# Altium PCB ADCAN.PcbDoc
Units mm, origin at the board's own origin, x right, y up, seen from the top; angles counter-clockwise.
Board outline 44 x 44 mm, 2 copper layers (Top Layer, Bottom Layer); 47 components, 39 nets, 161 pads, 52 vias.
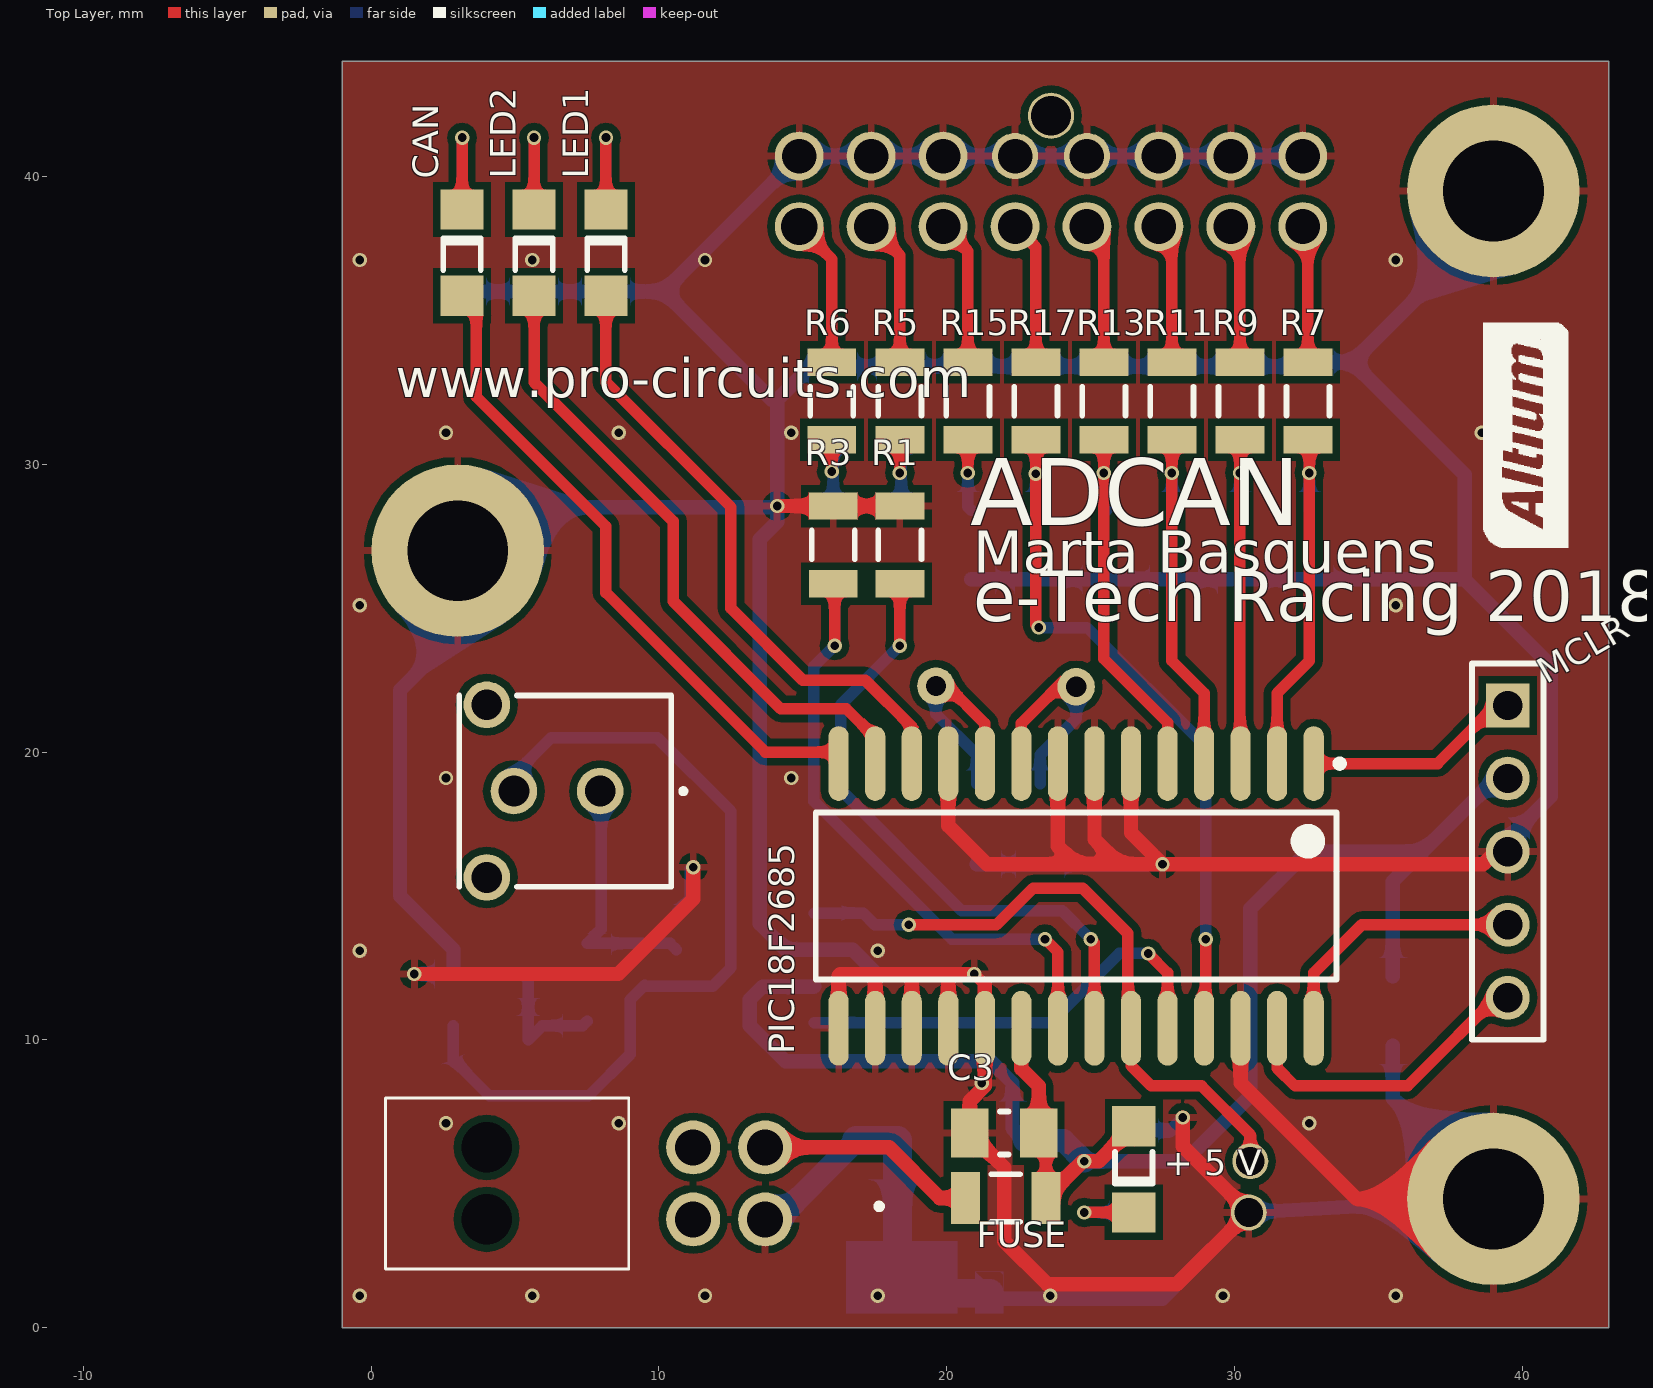
[diagram p0: Top Layer view]
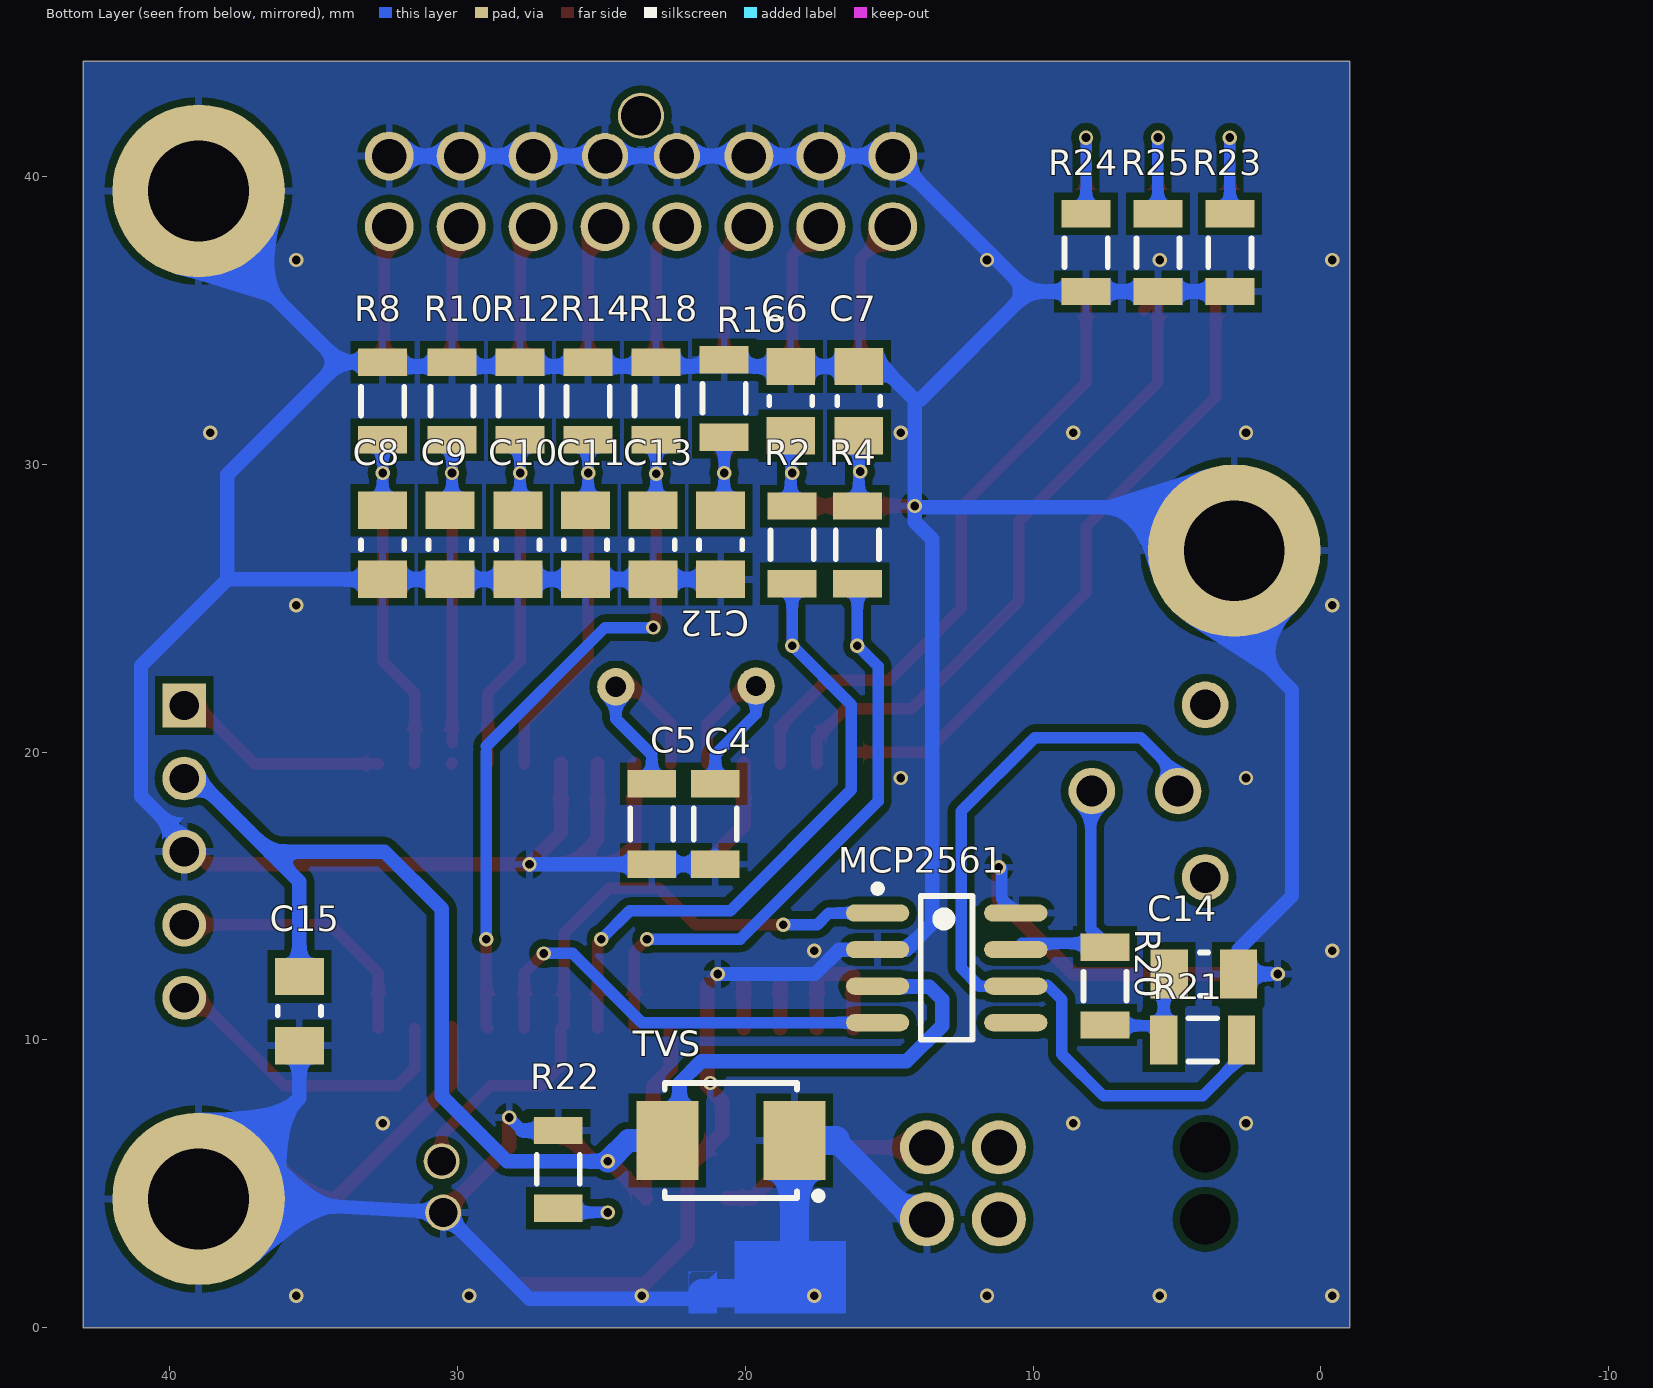
[diagram p1: Bottom Layer view, seen from below]

## Layer stack, top to bottom
Top Solder: solder mask 0.0102, Solder Resist, Dk 3.5
Top Layer: signal copper 0.0356
Dielectric 1: dielectric 0.32, FR-4, Dk 4.8
Bottom Layer: signal copper 0.0356
Bottom Solder: solder mask 0.0102, Solder Resist, Dk 3.5

## Board outline
-1,0 43,0 43,44 -1,44

## Design rules (kind name [scope] priority, off if disabled: settings)
Clearance [All] p1: gap=0.254 ignorepadtopadclearanceinfootprint=FALSE except(0: Arc-Hole Track-Hole SMDPad-Hole THPad-Hole Via-Hole Fill-Hole Poly-Hole Region-Hole Text-Hole)
PolygonConnect [All] p1: connectstyle=Relief reliefconductorwidth=0.254 reliefentries=4 polygonreliefangle="90 Angle" airgapwidth=0.254
RoutingVias [All] p1: holewidth=0.3 width=0.5 viastyle="Through Hole" minholewidth=0.3 minwidth=0.5 maxholewidth=0.3 maxwidth=0.5
SolderMaskExpansion [All] p1: expansion=0.102
Width [All] p1: maxlimit=1 minlimit=0.4 preferedwidth=0.4
30 further rules are at their usual default settings.

## Classes and differential pairs
component class ADCAN_v1: "+ 5 V" C3 C4 C5 C14 C15 CAN LED1 LED2 LEDalim LEDenviarCAN MCP2561 PIC18F2685 "Pin Header Programació" R20 R21 R22 R23 R24 R25
component class ADCAN1_v1: Alimentació C6 C7 C8 C9 C10 C11 C12 C13 FUSE "Molex Sensors" R1 R2 R3 R4 R5 R6 R7 R8 R9 R10 R11 R12 R13 R14 R15 R16 R17 R18 TVS

## Components (designator, comment, footprint, x,y, rotation, side; value= is the part's Value field where it differs from the comment)
"+ 5 V" "150120GS75000" 1206_A 26.5,5.5 r90 top
C3 "100nF" CAPC3216X102X94LL20 22,6.761 r0 top
C4 "15pF" CAPC1206(3216)100_L 21.043,17.5 r270 bottom
C5 "15pF" CAPC1206(3216)100_L 23.25,17.5 r270 bottom
C6 "100nF" CAPC3216X102X94LL20 18.42,32.2 r270 bottom
C7 "100nF" CAPC3216X102X94LL20 16.056,32.2 r270 bottom
C8 "100nF" CAPC3216X102X94LL20 32.606,27.2 r90 bottom
C9 "100nF" CAPC3216X102X94LL20 30.256,27.2 r90 bottom
C10 "100nF" CAPC3216X102X94LL20 27.906,27.2 r90 bottom
C11 "100nF" CAPC3216X102X94LL20 25.556,27.2 r90 bottom
C12 "100nF" CAPC3216X102X94LL20 20.856,27.2 r90 bottom
C13 "100nF" CAPC3216X102X94LL20 23.206,27.2 r90 bottom
C14 "100nF" CAPC3216X102X94LL20 4.06,12.285 r180 bottom
C15 "0.1uF" CAPC3216X102X94LL20 35.5,11 r90 bottom
CAN "150120BS75000" 1206_A 3.157,37.356 r270 top
FUSE "1206L016WR" LFUS-1206L016WR_V 22.05,4.5 r180 top
LED1 "150120BS75000" 1206_A 8.157,37.356 r270 top
LED2 "150120BS75000" 1206_A 5.657,37.356 r270 top
MCP2561 "" SOIC-SN8_N 13,12.5 r180 bottom
P? "MTLW-105-05-G-S-190" SMTC-MTLW-105-05-X-S-190 39.5,21.62 r270 top
PIC18F2685 "" SOIC-SO28_M 24.5,15 r270 top
R1 "4,29K" RESC1206(3216)_L 18.37,27.2 r270 top value="22000.00 Ohm"
R2 "4,29K" RESC1206(3216)_L 18.37,27.2 r90 bottom value="22000.00 Ohm"
R3 "4,29K" RESC1206(3216)_L 16.056,27.2 r270 top value="22000.00 Ohm"
R4 "4,29K" RESC1206(3216)_L 16.106,27.2 r90 bottom value="22000.00 Ohm"
R5 "1,6K" RESC1206(3216)_L 18.37,32.2 r270 top value="22000.00 Ohm"
R6 "1,6K" RESC1206(3216)_L 16.006,32.2 r270 top value="22000.00 Ohm"
R7 "1,6K" RESC1206(3216)_L 32.556,32.2 r270 top value="22000.00 Ohm"
R8 "1,6K" RESC1206(3216)_L 32.606,32.2 r90 bottom value="22000.00 Ohm"
R9 "1,6K" RESC1206(3216)_L 30.191,32.2 r270 top value="22000.00 Ohm"
R10 "1,6K" RESC1206(3216)_L 30.191,32.2 r90 bottom value="22000.00 Ohm"
R11 "1,6K" RESC1206(3216)_L 27.827,32.2 r270 top value="22000.00 Ohm"
R12 "1,6K" RESC1206(3216)_L 27.827,32.2 r90 bottom value="22000.00 Ohm"
R13 "1,6K" RESC1206(3216)_L 25.463,32.2 r270 top value="22000.00 Ohm"
R14 "1,6K" RESC1206(3216)_L 25.463,32.2 r90 bottom value="22000.00 Ohm"
R15 "1,6K" RESC1206(3216)_L 20.734,32.2 r270 top value="22000.00 Ohm"
R16 "1,6K" RESC1206(3216)_L 20.734,32.29 r90 bottom value="22000.00 Ohm"
R17 "1,6K" RESC1206(3216)_L 23.099,32.2 r270 top value="22000.00 Ohm"
R18 "1,6K" RESC1206(3216)_L 23.099,32.2 r90 bottom value="22000.00 Ohm"
R20 "60" RESC1206(3216)_L 7.5,11.865 r90 bottom value="1620.00 Ohm"
R21 "60" RESC1206(3216)_L 4.107,10 r0 bottom value="1620.00 Ohm"
R22 "1K 1% 1206(3216)" RESC1206(3216)_L 26.5,5.5 r270 bottom value="22000.00 Ohm"
R23 "1K 1% 1206(3216)" RESC1206(3216)_L 3.157,37.356 r90 bottom value="22000.00 Ohm"
R24 "1K 1% 1206(3216)" RESC1206(3216)_L 8.157,37.356 r90 bottom value="22000.00 Ohm"
R25 "1K 1% 1206(3216)" RESC1206(3216)_L 5.657,37.356 r90 bottom value="22000.00 Ohm"
TVS "" ONSC-SMB-2-403A-03_J_V 20.5,6.5 r0 bottom
? "Comment" 0430450212 10.427,18.644 r90 top

## Footprints (in the part's own frame and the unit in brackets; to place one, negate y for a bottom-side part, rotate by r counter-clockwise, add the part's x,y. Pads: shape width x height; smd on the part's side, far side on the other; paste and mask are expansions set on the pad)
1206_A [mm] "Chip LED, 2-Leads, Body 3.2x1.6mm, IPC Medium Density"
  rect 1.4x1.5 smd: 1(-1.5,0) 2(1.5,0)
  silkscreen extent -0.5,-0.67 0.6,0.65, body extent -1.6,-0.8 1.6,0.8, height 0.68
0430450212 [mm]
  round 1.62 hole 1.07: 1(0,2.47) 2(0,5.47) 3(-3,6.41) 4(3,6.41)
  silkscreen extent -3.32,-0.49 3.32,7.37
CAPC1206(3216)100_L [mm] "Chip Capacitor, Body 3.2x1.6mm, Height 1mm, IPC High Density"
  rect 0.95x1.7 smd: 1(-1.4,0) 2(1.4,0)
  silkscreen extent -0.55,-0.75 0.55,0.75, body extent -1.7,-0.9 1.7,0.9, height 1
CAPC3216X102X94LL20 [mm] "Chip Capacitor, 2-Leads, Body 3.4x1.8mm, IPC High Density"
  rect 1.3x1.7 smd: 1(-1.2,0) 2(1.2,0)
  silkscreen extent -0.15,-0.75 0.15,0.75, body extent -1.7,-0.9 1.7,0.9, height 1.02
LFUS-1206L016WR_V [mm] "SMD, 2-Leads, Body 3.2x1.65mm, Height 1.45mm (Max)"
  rect 1x1.8 smd: 1(-1.4,0) 2(1.4,0)
  silkscreen extent -0.5,-0.82 0.5,0.82, body extent -1.6,-0.82 1.6,0.82, height 1.45
ONSC-SMB-2-403A-03_J_V [mm]
  rect 2.159x2.743 smd: 1(-2.21,0) 2(2.21,0)
  silkscreen extent -3.16,-2 2.3,2.05, body extent -2.3,-1.97 2.3,1.97, height 2.47
RESC1206(3216)_L [mm] "Chip Resistor, Body 3.2x1.6mm, IPC High Density"
  rect 0.95x1.7 smd: 1(-1.35,0) 2(1.35,0)
  silkscreen extent -0.5,-0.75 0.5,0.75, body extent -1.67,-0.87 1.67,0.87, height 0.75
SMTC-MTLW-105-05-X-S-190 [mm] "Terminal Assembly, 1x5 Pins, Vertical, 2.54mm Pitch, Male"
  rect 1.52x1.52 hole 1.02: 1(0,0)
  round 1.52 hole 1.02: 2(2.54,0) 3(5.08,0) 4(7.62,0) 5(10.16,0)
  silkscreen extent -1.46,-1.24 11.62,1.24, body extent -1.27,-1.24 11.43,1.24, height 6.35
SOIC-SN8_N [mm] "SOIC, 8-Leads, Body 4.9x3.9mm, Pitch 1.27mm, IPC Medium Density"
  oval 2.2x0.6 smd: 1(-2.4,1.905) 2(-2.4,0.635) 3(-2.4,-0.635) 4(-2.4,-1.905) 5(2.4,-1.905) 6(2.4,-0.635) 7(2.4,0.635) 8(2.4,1.905)
  silkscreen extent -2.53,-2.5 0.9,2.88, body extent -2,-2.5 2,2.5, height 1.75
SOIC-SO28_M [mm] "SOIC, 28-Leads, Body 17.9x7.5mm, Pitch 1.27mm, IPC Low Density"
  oval 2.6x0.7 smd: 1(-4.6,8.255) 2(-4.6,6.985) 3(-4.6,5.715) 4(-4.6,4.445) 5(-4.6,3.175) 6(-4.6,1.905) 7(-4.6,0.635) 8(-4.6,-0.635) 9(-4.6,-1.905) 10(-4.6,-3.175) 11(-4.6,-4.445) 12(-4.6,-5.715) 13(-4.6,-6.985) 14(-4.6,-8.255) 15(4.6,-8.255) 16(4.6,-6.985) 17(4.6,-5.715) 18(4.6,-4.445) 19(4.6,-3.175) 20(4.6,-1.905) 21(4.6,-0.635) 22(4.6,0.635) 23(4.6,1.905) 24(4.6,3.175) 25(4.6,4.445) 26(4.6,5.715) 27(4.6,6.985) 28(4.6,8.255)
  silkscreen extent -4.72,-9.05 2.9,9.28, body extent -3.8,-9.05 3.8,9.05, height 2.65

## Part data
"+ 5 V": library part CMP-1426-00014-1, "SMD mono-color Chip LED, WL-SMCW, Green", Color=Green, Manufacturer="Wuerth Elektronik", ComponentLink1Description="Manufacturer URL", ComponentLink1URL=http://www.we-online.com, ComponentLink2Description=Datasheet, ComponentLink2URL=http://katalog.we-online.com/led/datasheet/150120GS75000.pdf, PackageReference=1206_A, PartNumber=150120GS75000
C3 C6 C7 C8 C9 C10 C11 C12 C13 C14 C15: library part CMP-2000-07385-1, "Chip Capacitor, 1.05 nF, +/- 12%, 14 V, -55 to 125 degC, 1206 (3216 Metric), RoHS, Tape and Reel", Capacitance="1050 /  / pF", Clamping Voltage="32 /  / V", Current, Leakage="15 /  / µA", Current, Ratings="150 /  / A", Energy Rating="0.4 /  / Joules", Manufacturer=AVX, Package Description="2-Pin Surface Mount Device, Body 3.2 x 1.6 mm", Package Reference=1206, Temperature, Junction, Maximum="+125 /  / °C", Temperature, Junction, Minimum="–55 /  / °C", Voltage, Breakdown="18.5 /  / V", Voltage, Operating="10/14 /  / VAC/VDC", Voltage, Working="14/10 /  / VDC/VAC", Brand/Series=TransGuard®, Configuration=Bidirectional, Current, Leakage, Maximum="15 /  / µA", Current, Reverse, Maximum="15 /  / µA", Current, Surge="150 /  / A", Datasheet URL=http://datasheets.avx.com/tguard.pdf, Datasheet Version=08/2016, Dimensions="3.2Lx1.6Wx0.94T /  / mm", For Use With=IndustrialEquipment, Manufacturer URL=http://www.avx.com/, Mounting Technology=SurfaceMount, Mounting Type=Thru-Hole, Package Type=1206, Primary Type=Diodes, Standards=ULListed, Suppressor Type=Voltage, Termination=Leadwires, Type=TVS, Voltage, Clamping="32 /  / V"
C4 C5: library part CMP-1037-00790-1, "CAP 15pF 16V ±10% 1206 (3216 Metric) Thickness 1mm SMD", Case-EIA=1206, Case-Metric=3216, Rated Voltage="16 V", Tolerance=±10%, Max Thickness="1 mm", Technology=SMT
CAN LED1 LED2: library part CMP-1426-00015-1, "SMD mono-color Chip LED, WL-SMCW, Blue", Color=Blue, Manufacturer="Wuerth Elektronik", ComponentLink1Description="Manufacturer URL", ComponentLink1URL=http://www.we-online.com, ComponentLink2Description=Datasheet, ComponentLink2URL=http://katalog.we-online.com/led/datasheet/150120BS75000.pdf, PackageReference=1206_A, PartNumber=150120BS75000
FUSE: library part CMP-2000-05471-1, "Resettable Fuse, 30 V, 100 A, 4.5 Ohm, -40 to 85 degC, 1206 (3216 Metric), RoHS, Tape and Reel", Hold Current [Ih]=0.16A, Manufacturer=Littelfuse, Operating Temp Range=-40to+85°C, Package Description="2-Pin Surface Mount Device, Body 3.2 x 1.65 mm, Height 1.45 mm (Max)", Trip Current=0.37A, Working Voltage-Max=30V, Datasheet URL=http://www.littelfuse.com/~/media/electronics/datasheets/resettable_ptcs/littelfuse_ptc_1206l_datasheet.pdf.pdf, Datasheet Version=08/2016, Manufacturer URL=http://www.littelfuse.com/, Mounting Technology=SurfaceMount, Package Reference=1206L016WR, Size=1206
MCP2561: library part CMP-0186-00138-2, "High-Speed CAN Transceiver, 8-Pin SOIC, Industrial Temperature", Code_IPC=SOIC127P600-8, Code_JEDEC=MS-012, ComponentLink1Description="Manufacturer URL", ComponentLink1URL=http://www.microchip.com/, ComponentLink2Description=Datasheet, ComponentLink2URL=http://ww1.microchip.com/downloads/en/DeviceDoc/21667F.pdf, ComponentLink3Description="Package Specification", ComponentLink3URL=http://www.microchip.com/stellent/groups/techpub_sg/documents/packagingspec/en012702.pdf, DatasheetVersion="revF, Jul-2010", PackageDescription="8-Lead Plastic Small Outline (SN) - Narrow, 3.90mm Body [SOIC]", PackageReference=SOIC-SN8, PackageVersion="revBB, Aug-2009", RevisionNote="URLs added. DatasheetVersion updated."
P?: library part CMP-1024-00076-1, Manufacturer=Samtec, Temperature Range="-55 to 125 degC", ComponentLink1Description="Manufacturer URL", ComponentLink1URL=http://www.samtec.com, ComponentLink2Description=Datasheet, ComponentLink2URL=http://www.samtec.com/documents/webfiles/pdf/MTLW_TH.PDF, ComponentLink3Description="Package Specification", ComponentLink3URL=http://www.samtec.com/documents/webfiles/cpdf/MTLW-1XX-XX-XX-X-XXX-XX-XX-MKT1.pdf, DatasheetVersion=F-214, Mounting Technology=Through-hole, Orientation=Vertical, PackageDescription="Low Profile Terminal Assembly", PackageReference=MTLW-105-05-X-S-190, PackageVersion="T, 6/1991", PartNumber=MTLW-105-05-G-S-190, Pitch="2.54 mm", RoHS=True
PIC18F2685: library part CMP-0116-01073-1, "Enhanced Flash Microcontroller with ECAN Technology, 10-Bit A/D and nanoWatt Technology, 96K Flash, 28-Pin SOIC, Extended Temperature Range, Tape and Reel", Code_JEDEC=MS-013, ComponentAvailability="Unknown. Contact manufacturer to determine status.", DatasheetVersion="revC, Oct-2009", PackageDescription="28-Lead Plastic Small Outline (SO) - Wide 7.50mm Body [SOIC]", PackageReference=SOIC-SO28, PackageVersion="revBB, Aug-2009"
R1 R2 R3 R4 R5 R6 R7 R8 R9 R10 R11 R12 R13 R14 R15 R16 R17 R18 R22 R23 R24 R25: library part CMP-1014-00659-1, "22K 0.25W 1% 1206 (3216 Metric)  SMD", Case-EIA=1206, Case-Metric=3216, Power="0.25 W", Tolerance="1 %", Technology=SMT
R20 R21: library part CMP-1014-00532-1, "1K62 0.25W 1% 1206 (3216 Metric)  SMD", Case-EIA=1206, Case-Metric=3216, Power="0.25 W", Tolerance="1 %", Technology=SMT
TVS: library part CMP-1679-00003-1, "TVS ZENER UNIDIR 600W 27V SMB", PartNumber=P6SMB27AT3G, ComponentLink1Description=Datasheet, ComponentLink1URL=http://www.onsemi.com/pub_link/Collateral/P6SMB6.8AT3-D.PDF, PackageReference=SMB-2-403A-03_J

## Free pads (board coordinates)
  round 1.875 hole 1.25: 1(13.69,3.761) 2(13.69,6.261) 3(11.19,3.761) 4(11.19,6.261)
  round 1.7 hole 1.2: 1(32.375,40.715) 2(29.875,40.715) 3(27.375,40.715) 6(19.875,40.715) 7(17.375,40.715) 8(14.875,40.715) 9(32.375,38.265) 10(29.875,38.265) 11(27.375,38.265) 12(24.875,38.265) 13(22.375,38.265) 14(19.875,38.265) 15(17.375,38.265)
  round 1.6 hole 1.2: 4(24.875,40.715) 5(22.375,40.715)
  round 0.875 hole 1.75 unplated: 5(4.01,6.261) 6(4.01,3.761)
  round 1.25 hole 1: 7(30.55,5.78) 8(30.5,4)
  round 6 hole 3.5: 9(3.007,27) 9(39,39.5) 10(39,4.471)
  round 1.3 hole 0.7: 9(24.5,22.269) 10(19.625,22.294)
  round 1.7 hole 1.28: 16(14.875,38.265)
  round 1.6 hole 1.38: 31(23.625,42.115)

## Via types
v1: diameter 0.5, hole 0.3, Top Layer to Bottom Layer, 52 vias

## Nets (pads, with @x,y where several pads share a name; then routed paths per layer and width w, separated by ;. In a path a pad name is that pad's centre, name@x,y a point inside that pad or via, vN(x,y) a via of type N, cw(c..) or ccw(c..) an arc to the next point about the centre after c; other vN are vias at no path point)
+5: "+ 5 V.2" C3.2 C15.2 FUSE.1 MCP2561.3 P?.2 PIC18F2685.20 TVS.2 | length 57.2
  Top Layer w0.4: C3.2 23.45,6.511 FUSE.1 ; v1@24.73,5.78 v1(24.78,5.78)
  Top Layer w0.5: PIC18F2685.20 22.595,9 23.2,8.395 C3.2 ; FUSE.1 v1@24.73,5.78 ; v1(24.78,5.78) 25.28,5.78 26.5,7
  Bottom Layer w0.5: MCP2561.3 15.385,11.85 13.607,11.85 13.157,11.4 13.157,10.493 14.396,9.254 21.532,9.254 22.286,8.5 22.286,6.924 TVS.2 ; v1(24.78,5.78) 28.28,5.78 30.55,8.05 30.55,14.55 32.539,16.539 36.539,16.539 ; C15.2 35.5,15.5 36.539,16.539 ; P?.2@39.5,19.5 36.539,16.539
  Bottom Layer w0.8: TVS.2 24.06,6.5 v1(24.78,5.78)
GND: C3.1 C4.2 C5.2 C6.1 C7.1 C8.1 C9.1 C10.1 C11.1 C12.1 C13.1 C14.2 C15.1 MCP2561.2 MCP2561.8 P?.3 pad.1 pad.2@29.875,40.715 pad.3@27.375,40.715 pad.4@24.875,40.715 pad.5@22.375,40.715 pad.6@19.875,40.715 pad.7@17.375,40.715 pad.8 pad.9@3.007,27 pad.9@39,39.5 pad.10@39,4.471 PIC18F2685.6 PIC18F2685.7 PIC18F2685.8 PIC18F2685.11 PIC18F2685.15 PIC18F2685.16 PIC18F2685.17 PIC18F2685.18 PIC18F2685.19 PIC18F2685.26 R1.1 R3.1 R8.2 R10.2 R12.2 R14.2 R16.2 R18.2 R22.1 R23.1 R24.1 R25.1 TVS.1 | length 307.5
  Top Layer w0.4: 16.245,12.23 16.3,12.285 ; 17.5,12.285 17.515,12.27 ; 18.785,12.07 19,12.285 ; 19.98,12.285 20.055,12.21 ; v1(20.96,12.285) 21.325,11.92 ; v1(21.22,8.5) v1@21.325,8.395
  Top Layer w0.5: v1(1.5,12.285) 8.583,12.285 11.19,14.893 v1(11.19,16) ; v1(14.106,28.55) R1.1 ; PIC18F2685.15 16.245,12.23 ; 16.3,12.285 17.5,12.285 19,12.285 19.98,12.285 v1(20.96,12.285) ; PIC18F2685.16 17.515,12.27 ; PIC18F2685.17 18.785,12.07 ; PIC18F2685.18 20.055,12.21 ; PIC18F2685.11 20.055,17.445 21.4,16.1 24.5,16.1 ; 21.325,11.92 PIC18F2685.19 21.325,8.395 20.8,7.87 C3.1 22,5.561 22,3 23.5,1.5 28,1.5 30.5,4 28.2,6.3 v1(28.2,7.3) ; PIC18F2685.8 23.865,16.735 24.5,16.1 ; PIC18F2685.7 25.135,16.965 26,16.1 ; PIC18F2685.6 26.405,17.195 v1(27.5,16.1) ; PIC18F2685.26 30.215,8.5 34.244,4.471 pad.10@39,4.471 ; P?.3@39.5,16.96 38.64,16.1 v1(27.5,16.1) ; 24.5,16.1 26,16.1 ; 26,16.1 v1(27.5,16.1)
  Bottom Layer w0.4: pad.9@2,25.5 3.254,26.754 pad.9@3.007,27 ; C14.2 C14.2@2.86,12.5 ; MCP2561.8 11.091,14.896 11.091,15.966 11.125,16 v1(11.19,16) ; C4.2 C4.2@21.043,16.457 ; 27.75,6.85 v1(28.2,7.3) ; R8.2@32.456,33.4 R8.2
  Bottom Layer w0.5: v1(1.5,12.285) C14.2@2.757,12.285 ; pad.9@2,25.5 3.175,24.325 1,22.15 1,15 2.86,13.14 C14.2@2.86,12.5 ; pad.9@3.007,27 5.514,28.506 14.062,28.506 v1(14.106,28.55) ; R23.1 R25.1 R24.1 10.166,36.006 ; C12.1 C13.1 C11.1 C10.1 C9.1 C8.1 38,26 ; v1(20.96,12.285) 17.58,12.285 16.73,13.135 MCP2561.2 14.405,13.135 13.5,14.04 13.5,27.394 14.106,28 v1(14.106,28.55) ; C4.2 C5.2 v1(27.5,16.1) ; 21.495,1.189 21.684,1 27.5,1 30.5,4 39,4.471 35.5,7.971 C15.1 ; R22.1 27.75,6.85 ; pad.1@32.375,40.715 29.875,40.715 27.375,40.715 24.875,40.715 22.375,40.715 19.875,40.715 17.375,40.715 14.875,40.715 10.166,36.006 ; R8.2@32.456,33.4 C6.1 C7.1 15.257,33.4 14.106,32.249 ; R8.2 34.09,33.55 ; pad.10@36.462,5.308 pad.10@37,5 ; pad.9@39,39.5 39,38.46 34.09,33.55 ; P?.3@39.5,16.96 41,18.46 41,23 38,26 ; 10.166,36.006 13.924,32.249 14.106,32.249 ; v1(14.106,28.55) 14.106,32.249 ; 34.09,33.55 38,29.64 38,26
  Bottom Layer w0.8: pad.1@13.864,3.5 16.864,6.5
  Bottom Layer w1: 16.864,6.5 TVS.1 18.29,2.654 ; 19.321,1.189 21.495,1.189
  other v1: -0.4,1.1 5.6,1.1 11.6,1.1 17.6,1.1 23.6,1.1 29.6,1.1 35.6,1.1 2.6,7.1 8.6,7.1 32.6,7.1 -0.4,13.1 17.6,13.1 2.6,19.1 14.6,19.1 -0.4,25.1 35.6,25.1 2.6,31.1 8.6,31.1 14.6,31.1 38.6,31.1 -0.4,37.1 5.6,37.1 11.6,37.1 35.6,37.1
"Net+ 5 V_1": "+ 5 V.1" R22.2 | length 3.8
  Top Layer w0.4: v1(24.78,4) 26.5,4
  Bottom Layer w0.4: v1(24.78,4) 26.65,4 R22.2
NetAlimentació_2: FUSE.2 pad.2@13.69,6.261 | length 6.8
  Top Layer w0.5: pad.2@14.6,6.261 18,6.261 19.761,4.5 FUSE.2
NetC4_1: C4.1 pad.10@19.625,22.294 PIC18F2685.10 | length 7.6
  Top Layer w0.4: pad.10@19.625,22.294 20.026,22.294 21.325,20.995 PIC18F2685.10
  Bottom Layer w0.4: pad.10@19.625,22.294 19.625,21.325 21.043,19.907 C4.1
NetC5_1: C5.1 pad.9@24.5,22.269 PIC18F2685.9 | length 7.7
  Top Layer w0.4: PIC18F2685.9 22.595,20.995 23.869,22.269 pad.9@24.5,22.269
  Bottom Layer w0.4: C5.1 23.25,19.907 24.5,21.157 pad.9@24.5,22.269
NetC6_2: C6.2 R2.2 R5.2 | length 3.6
  Top Layer w0.4: v1(18.37,29.7) R5.2
  Bottom Layer w0.4: C6.2 18.42,28.586 R2.2@18.456,28.55
NetC7_2: C7.2 R4.2 R6.2 | length 3.6
  Top Layer w0.4: v1(16.006,29.75) R6.2
  Bottom Layer w0.4: v1(16.006,29.75) v1@16.056,29.7 ; C7.2 v1@16.056,29.7 ; R4.2 16.056,28.6 v1@16.056,29.7
NetC8_2: C8.2 PIC18F2685.2 R7.2 R8.1 | length 14.2
  Top Layer w0.4: PIC18F2685.2@31.5,19.615 PIC18F2685.2 31.485,22.049 32.606,23.17 v1(32.606,29.7) 32.606,30.8 R7.2
  Bottom Layer w0.4: C8.2 v1(32.606,29.7) R8.1
NetC9_2: C9.2 PIC18F2685.3 R9.2 R10.1 | length 13
  Top Layer w0.4: PIC18F2685.3@30.191,19.624 PIC18F2685.3 ; PIC18F2685.3@30.191,20.324 v1(30.191,29.7) R9.2
  Bottom Layer w0.4: R10.1 v1(30.191,29.7) 30.191,28.464 C9.2
NetC10_2: C10.2 PIC18F2685.4 R11.2 R12.1 | length 14.2
  Top Layer w0.4: R11.2 v1(27.827,29.7) 27.827,23.167 28.945,22.049 PIC18F2685.4
  Bottom Layer w0.4: R12.1 v1(27.827,29.7) 27.827,28.479 C10.2
NetC11_2: C11.2 PIC18F2685.5 R13.2 R14.1 | length 14.7
  Top Layer w0.4: R13.2 v1(25.463,29.7) 25.463,23.237 27.675,21.025 PIC18F2685.5
  Bottom Layer w0.4: R14.1 v1(25.463,29.7) 25.463,28.493 C11.2
NetC12_2: C12.2 R15.2 R16.1 | length 3.7
  Top Layer w0.4: v1(20.734,29.7) R15.2
  Bottom Layer w0.4: R16.1 v1(20.734,29.7) 20.734,28.521 C12.2
NetC13_2: C13.2 PIC18F2685.25 R17.2 R18.1 | length 26.2
  Top Layer w0.4: R17.2 v1(23.099,29.679) 23.099,24.429 v1(23.2,24.328) ; PIC18F2685.25 29,10.455 v1(29,13.5)
  Bottom Layer w0.4: R18.1 v1(23.099,29.679) 23.099,28.507 C13.2 ; v1(23.2,24.328) 24.872,24.328 29,20.2 ; v1(29,13.5) 29,20
NetC14_1: C14.1 R20.1 R21.2 | length 4.7
  Bottom Layer w0.4: C14.1 5.457,12.088 R21.2 5.95,10.493 7.343,10.493 R20.1@7.5,10.65
NetCAN2_1: ?.2 MCP2561.6 R21.1 | length 29.3
  Bottom Layer w0.4: R21.1@2.857,10.493 2.857,9.3 4.107,8.05 7.55,8.05 9,9.5 9,11.4 9.5,11.9 9.535,11.865 MCP2561.6 11.865,11.865 12.5,12.5 12.5,17.944 9.944,20.5 6.25,20.5 5,19.25 ?.2@5,18.814
NetCAN2_2: ?.1 MCP2561.7 R20.2 | length 8.9
  Bottom Layer w0.4: ?.1@8,18.814 8,13.85 7.5,13.35 10.385,13.35 MCP2561.7
NetCAN_1: CAN.1 R23.2 | length 5.1
  Top Layer w0.4: CAN.1 v1(3.157,41.356)
  Bottom Layer w0.4: R23.2 v1(3.157,41.356)
NetCAN_2: CAN.2 PIC18F2685.14 | length 22.7
  Top Layer w0.4: CAN.2@3.45,35.95 3.657,35.743 3.657,32.343 8.157,27.843 8.157,25.543 13.7,20 PIC18F2685.14@16.245,20
NetLED1_1: LED1.1 R24.2 | length 5.1
  Top Layer w0.4: LED1.1 v1(8.157,41.356)
  Bottom Layer w0.4: R24.2 v1(8.157,41.356)
NetLED1_2: LED1.2 PIC18F2685.12 | length 21.9
  Top Layer w0.4: LED1.2 8.157,32.856 12.5,28.514 12.5,25 15,22.5 17.174,22.5 18.785,20.889 PIC18F2685.12
NetLED2_1: LED2.1 R25.2 | length 5.1
  Top Layer w0.4: LED2.1 v1(5.657,41.356)
  Bottom Layer w0.4: R25.2 v1(5.657,41.356)
NetLED2_2: LED2.2 PIC18F2685.13 | length 23.2
  Top Layer w0.4: LED2.2@6.157,35.356 LED2.2 5.657,32.856 10.5,28.014 10.5,25.237 14.237,21.5 16.515,21.5 17.515,20.5 PIC18F2685.13 PIC18F2685.13@17.5,19.615
NetMCP2561_1: MCP2561.1 pad.7@30.55,5.78 PIC18F2685.23 | length 22.9
  Top Layer w0.4: v1(18.679,13.999) 21.73,13.999 23,15.269 24.73,15.269 26.296,13.703 26.296,10.509 PIC18F2685.23 26.405,9.095 27.105,8.395 28.855,8.395 30.55,6.7 pad.7@30.55,5.78
  Bottom Layer w0.4: MCP2561.1 17.095,14.405 17.501,13.999 v1(18.679,13.999)
NetMCP2561_4: MCP2561.4 PIC18F2685.24 | length 15.5
  Top Layer w0.4: v1(27,13) 27.675,12.325 PIC18F2685.24
  Bottom Layer w0.4: MCP2561.4 23.595,10.595 26,13 v1(27,13)
NetP?_1: P?.1 PIC18F2685.1 | length 7.8
  Top Layer w0.4: PIC18F2685.1 37.06,19.6 P?.1@39.5,22.04
NetP?_4: P?.4 PIC18F2685.28 | length 9.5
  Top Layer w0.4: PIC18F2685.28 32.755,12.325 34.429,13.999 39.079,13.999 P?.4@39.5,14.42
NetP?_5: P?.5 PIC18F2685.27 | length 11.1
  Top Layer w0.4: PIC18F2685.27 31.485,9.015 32.105,8.395 33.824,8.395 36.015,8.395 P?.5@39.5,11.88
NetPIC18F2685_21: PIC18F2685.21 R3.2 R4.1 | length 23.3
  Top Layer w0.4: R3.2 16.106,25.8 v1(16.106,23.7) ; v1(23.415,13.5) 23.865,13.05 PIC18F2685.21
  Bottom Layer w0.4: R4.1 v1(16.106,23.7) 15.385,22.979 15.385,18.294 18.679,15 20.179,13.5 v1(23.415,13.5)
NetPIC18F2685_22: PIC18F2685.22 R1.2 R2.1 | length 24.5
  Top Layer w0.4: R1.2@17.949,25.85 R1.2@18.16,25.64 ; v1(18.37,23.7) R1.2 ; v1(25,13.5) 25.135,13.365 PIC18F2685.22
  Bottom Layer w0.4: R2.1 v1(18.37,23.7) 16.314,21.644 16.314,18.686 20.515,14.485 24.015,14.485 v1(25,13.5)
NetR3_1: 
NetR5_1: pad.15 R5.1 | length 5.1
  Top Layer w0.4: pad.15 18.37,37.27 R5.1
NetR6_1: pad.16 R6.1 | length 5.2
  Top Layer w0.4: pad.16 16.006,37.134 R6.1
NetR7_1: pad.9@32.375,38.265 R7.1 | length 4.8
  Top Layer w0.4: pad.9@32.375,38.265 32.556,38.084 R7.1
NetR9_1: pad.10@29.875,38.265 R9.1 | length 4.8
  Top Layer w0.4: pad.10@29.875,38.265 30.191,37.949 R9.1
NetR11_1: pad.11 R11.1 | length 4.9
  Top Layer w0.4: pad.11 27.827,37.813 R11.1
NetR13_1: pad.12 R13.1 | length 5
  Top Layer w0.4: pad.12 25.463,37.677 R13.1
NetR15_1: pad.14 R15.1 | length 5.1
  Top Layer w0.4: pad.14 20.734,37.406 R15.1
NetR17_1: pad.13 R17.1 | length 5
  Top Layer w0.4: pad.13 23.099,37.541 R17.1
pads on no net: ?.3 ?.4 MCP2561.5

## Polygon pours and split planes (outlines as drawn)
no net on Bottom Overlay (solid): -3.6,33.775
GND on Top Layer "Top Layer-GND" (solid, pour order 102): -1,44 43,44 43,0 42.975,-0.025 42.95,0 -1,0
GND on Bottom Layer "Bottom Layer-GND" (solid, pour order 104): -1,44 43,44 43,0 -1,0

## Other copper
Bottom Layer:
  pour cut-out: -10,26.5
  region net GND: 21,1.932 21.856,1.932 21.96,1.827 21.96,0.5 21,0.5 21,1.932 21.96,1.932 21.96,1.015
  region net GND: 20.364,0.5 20.364,3 16.5,3 16.5,0.5

## Silkscreen, mask and mechanical layers (free items; w line width, h text height)
Top Overlay:
  drawing of 567 lines, arcs and shapes, not listed
  text "www.pro-circuits.com" at 0.85,31.875 h2.3
  text "ADCAN" at 20.825,27.125 h4
  text "Marta Basquens" at 20.925,25.753 h2.5
  text "e-Tech Racing 2018-2019" at 20.925,23.975 h3
  text "MCLR" at 41,22.1 h1.52 r30
Mechanical 1:
  lines w0.254: -1.172,44.103 -1.172,-0.125 43.1,-0.125 43.125,-0.1 43.125,44.125 -1.15,44.125 ; -1.025,-0.125 -0.7,-0.125 -1.025,-0.125
Mechanical 15:
  lines w0.2: 0.5,2.041 0.5,7.981 8.95,7.981 8.95,2.041 0.5,2.041
Mechanical 20:
  lines w0.1: 34.769,-12.94 34.769,3.75 42.709,3.75 42.709,-12.94 34.769,-12.94